# Altium PCB uPre V2.PcbDoc
Units mil, origin at the board's own origin, x right, y up, seen from the top; angles counter-clockwise.
Board outline 1245.03 x 955.03 mil, 2 copper layers (Top Layer, Bottom Layer); 21 components, 15 nets, 54 pads, 3 vias.
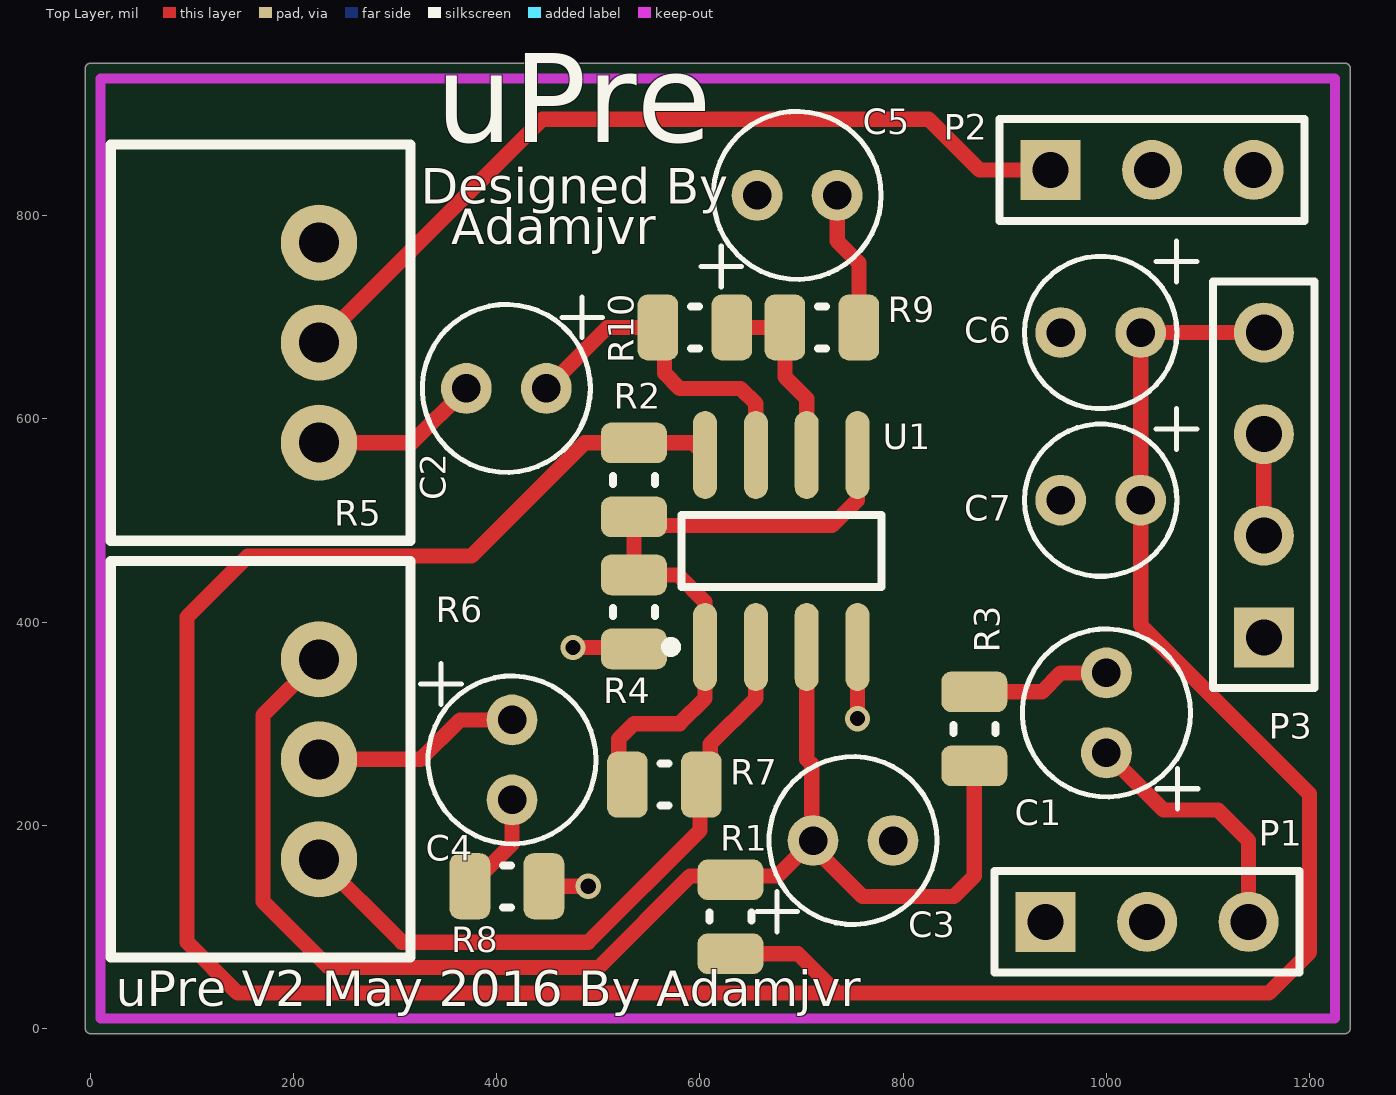
[diagram p0: Top Layer view]
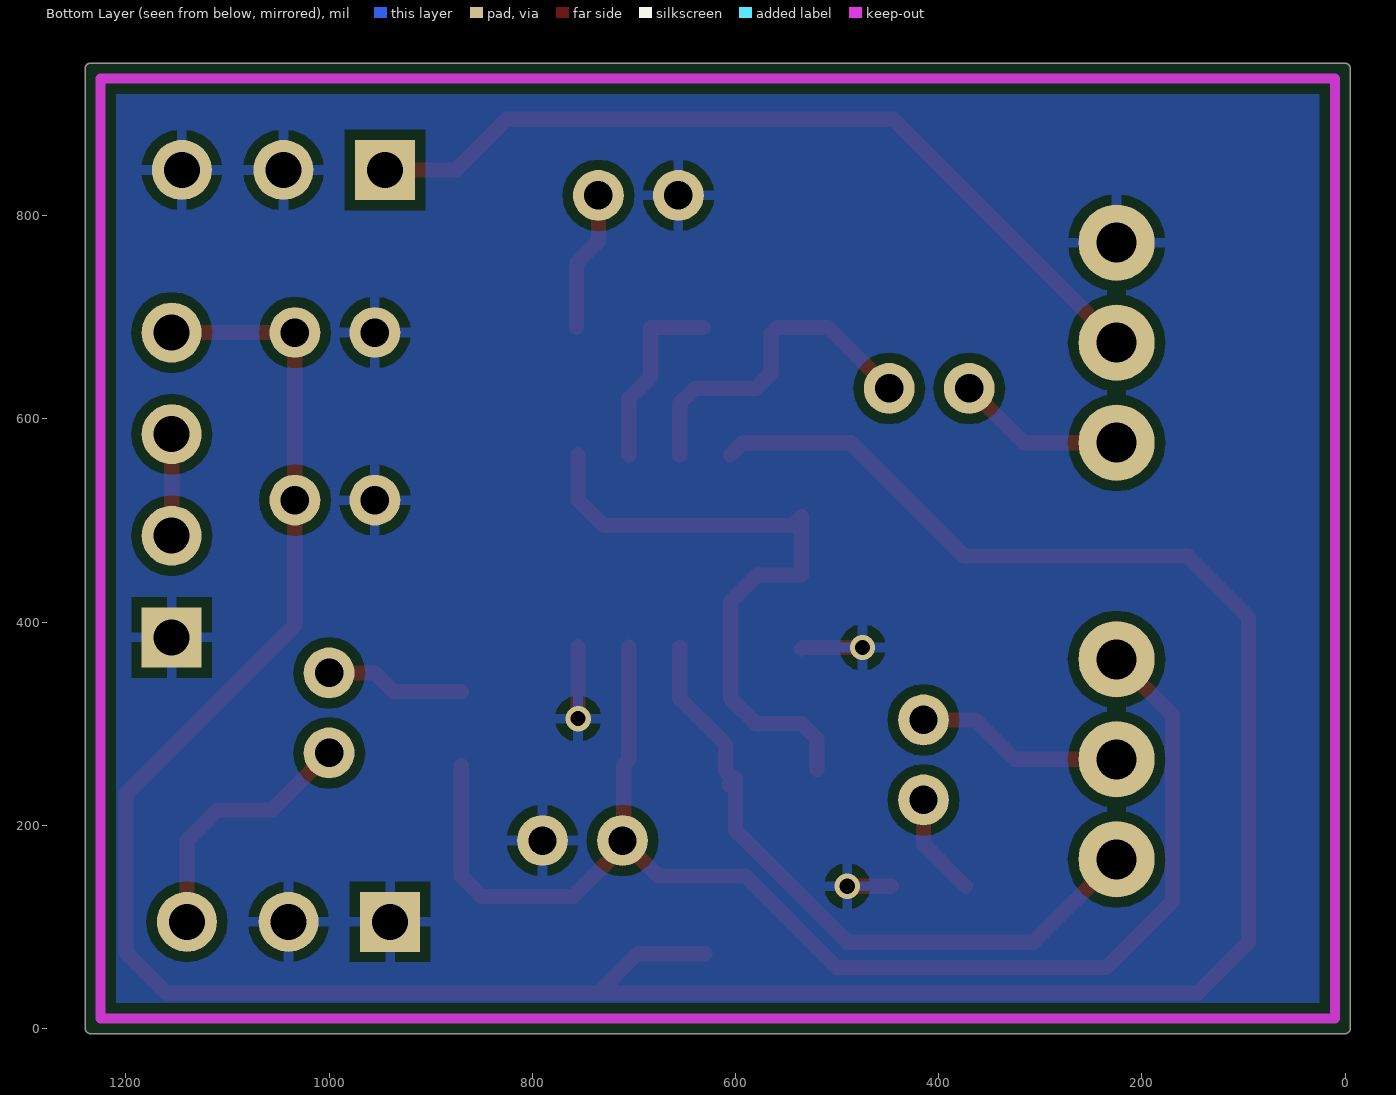
[diagram p1: Bottom Layer view, seen from below]

## Layer stack, top to bottom
Top Solder: solder mask 0.4, Solder Resist, Dk 3.5
Top Layer: signal copper 1.4
Dielectric 1: dielectric 12.6, FR-4, Dk 4.8
Bottom Layer: signal copper 1.4
Bottom Solder: solder mask 0.4, Solder Resist, Dk 3.5

## Board outline
0,-5.01 cw(c0,0) -5.01,0 -5.01,945 cw(c0,945) 0,950.01 1235,950.01 cw(c1235,945) 1240.01,945 1240.01,0 cw(c1235,0) 1235,-5.01

## Design rules (kind name [scope] priority, off if disabled: settings)
Clearance [All] p1: gap=10
HoleSize [All] p1: absolutevalues=TRUE maxlimit=100 minlimit=13 maxpercent=80.000 minpercent=20.000
PolygonConnect [All] p1: connectstyle=Relief reliefconductorwidth=10 reliefentries=4 polygonreliefangle="90 Angle" airgapwidth=10
RoutingVias [All] p1: holewidth=28 width=50 viastyle="Through Hole" minholewidth=28 minwidth=50 maxholewidth=28 maxwidth=50
SolderMaskExpansion [All] p1: expansion=4
Width [All] p1: maxlimit=50 minlimit=10 preferedwidth=15 minimp=50.000000 maximp=50.000000 favimp=50.000000
29 further rules are at their usual default settings.

## Components (designator, comment, footprint, x,y, rotation, side; value= is the part's Value field where it differs from the comment)
C1 "10uF" 4X6mmCAP 1000,350 r270 top
C2 "10uF" 4X6mmCAP 370,630 r0 top
C3 "0.22uF" 4X6mmCAP 790,185 r180 top
C4 "0.22uF" 4X6mmCAP 415,225 r90 top
C5 "10uF" 4X6mmCAP 735,820 r180 top
C6 "47uF" "5X12.5mmCAP - BLUE" 955,685 r0 top
C7 "47uF" "5X12.5mmCAP - BLUE" 955,520 r0 top
P1 "Header 3" HDR1X3 940,105 r0 top
P2 "Header 3" HDR1X3 945,845 r0 top
P3 "Header 4" HDR1X4 1155,385 r90 top
R1 "10K" R0805 630,110 r270 top
R2 "2.2M" R0805 535,540 r90 top
R3 "1K" R0805 870,295 r90 top
R4 "2.2M" R0805 535,410 r90 top
R5 "100K" BOURNS_PTD90SERIES_POT 225,675 r90 top
R6 "20K" BOURNS_PTD90SERIES_POT 225,265 r90 top
R7 "1K" R0805 565,240 r0 top
R8 "220r" R0805 410,140 r180 top
R9 "100K" R0805 720,690 r0 top
R10 "220K" R0805 595,690 r0 top
U1 "RC4580IDR" SOIC127P600X175-8N 680,470 r90 top

## Footprints (in the part's own frame and the unit in brackets; to place one, negate y for a bottom-side part, rotate by r counter-clockwise, add the part's x,y. Pads: shape width x height; smd on the part's side, far side on the other; paste and mask are expansions set on the pad)
4X6mmCAP [mil]
  round 50 hole 28: 1(78.74,0) 2(0,0)
  silkscreen extent -43,-83 134,90, body extent -39,-79 119,79, height 236
"5X12.5mmCAP - BLUE" [mil]
  round 50 hole 28: 1(78.74,0) 2(0,0)
  silkscreen extent -36,-75 134,90, body extent -35,-75 115,75, height 492
BOURNS_PTD90SERIES_POT [mm] "Bourns Inc PTD90 Series Potentiometers, throughhole right angle PCB MOunted"
  round 1.905 hole 1: 1(-2.5,0) 2(0,0) 3(2.5,0)
  silkscreen extent -4.95,-2.29 4.95,5.21, body extent -4.8,-2.13 4.8,20.02, height 11.2
HDR1X3 [mm] "Connector; Header; 3 Position"
  rect 1.5x1.5 hole 0.9: 1(0,0)
  round 1.5 hole 0.9: 2(2.54,0) 3(5.08,0)
  silkscreen extent -1.27,-1.27 6.35,1.27
HDR1X4 [mm] "Connector; Header; 4 Position"
  rect 1.5x1.5 hole 0.9: 1(0,0)
  round 1.5 hole 0.9: 2(2.54,0) 3(5.08,0) 4(7.62,0)
  silkscreen extent -1.27,-1.27 8.89,1.27
R0805 [mil]
  rrect50% 40x65 smd: 1(-36.42,0) 2(36.42,0)
  silkscreen extent -4,-21 4,21, body extent -43,-28 43,28, height 20
SOIC127P600X175-8N [mm] "SOIC, 8-Leads, Body 4.75x3.90mm, Pitch 1.27mm, IPC Medium Density"
  oval 2.2x0.6 smd: 1(-2.4,1.905) 2(-2.4,0.635) 3(-2.4,-0.635) 4(-2.4,-1.905) 5(2.4,-1.905) 6(2.4,-0.635) 7(2.4,0.635) 8(2.4,1.905)
  silkscreen extent -2.52,-2.5 0.9,2.88, body extent -2,-2.5 2,2.5, height 1.75

## Part data
C1 C2 C5: library part UMW1C100MDD1TP, "CAP ALUM 10UF 20% 16V RADIAL"
C3 C4: library part UMW1HR22MDD1TP, "CAP ALUM 0.22UF 20% 50V RADIAL"
C6 C7: library part UKA1E470MDD1TD, "CAP ALUM 47UF 20% 25V RADIAL"
P1 P2: "Header, 3-Pin"
P3: "Header, 4-Pin"
R1: library part ERJ-6ENF1002V, "RES SMD 10K OHM 1% 1/8W 0805"
R2 R4: library part RC2012F225CS, "RES SMD 2.2M OHM 1% 1/8W 0805"
R3 R7: library part RC2012F102CS, "RES SMD 1K OHM 1% 1/8W 0805"
R5: library part PTD901-2015K-B104, "POT 100K OHM 1/20W CARBON LINEAR"
R6: library part PTD901-2015K-B203, "POT 20K OHM 1/20W CARBON LINEAR"
R8: library part RC2012F221CS, "RES SMD 220 OHM 1% 1/8W 0805"
R9: library part ERJ-6ENF1003V, "RES SMD 100K OHM 1% 1/8W 0805"
R10: library part RC2012F224CS, "RES SMD 220K OHM 1% 1/8W 0805"
U1: "IC OPAMP AUDIO 12MHZ 8SOIC Low Noise, High Performance, High Fidelity Dual Audio Operational Amplifier, 8-pin Narrow SOIC"

## Via types
v1: diameter 25, hole 15, Top Layer to Bottom Layer, 3 vias

## Nets (pads, with @x,y where several pads share a name; then routed paths per layer and width w, separated by ;. In a path a pad name is that pad's centre, name@x,y a point inside that pad or via, vN(x,y) a via of type N, cw(c..) or ccw(c..) an arc to the next point about the centre after c; other vN are vias at no path point)
9VCC: C6.1 C7.1 P3.4 R1.2 R2.2 U1.8 | length 2964.3
  Top Layer w15: U1.8 593.07,576.42 R2.2 486.42,576.42 375,465 155,465 95,405 95,85 145,35 735,35 ; R1.2 696.42,73.58 735,35 ; C6.1@1033.74,675 C7.1 1033.74,397.2 1200,230.94 1200,75 1160,35 735,35 ; C6.1 P3.4@1160,685
GND: C3.2 C5.1 C6.2 C7.2 P1.1 P1.2 P2.2 P2.3 P3.1 R4.1 R5.3 R8.1 U1.4 | length 174.7
  Top Layer w15: R8.1 v1(490,140) ; v1(475,375) 533.58,375 R4.1 ; v1(755,305) U1.4
NetC1_1: C1.1 P1.3 | length 255.7
  Top Layer w15: C1.1 1056.26,215 1110,215 1140,185 P1.3
NetC1_2: C1.2 R3.2 | length 137.7
  Top Layer w15: R3.2 936.42,331.42 955,350 C1.2
NetC2_1: C2.1 R10.1 U1.7 | length 335.3
  Top Layer w15: C2.1 508.74,690 R10.1 565,683.58 565,645 580,630 640,630 655,615 U1.7
NetC2_2: C2.2 R5.1 | length 167.1
  Top Layer w15: R5.1 316.57,576.57 C2.2
NetC3_1: C3.1 R1.1 R3.1 R6.3 U1.3 | length 1376.3
  Top Layer w15: R6.3 170,308.43 170,125 235,60 500.36,60 590.36,150 676.26,150 C3.1 ; U1.3 705,265 710,260 710,186.26 C3.1 ; R3.1 870,150 850,130 760,130 711.26,178.74 C3.1
NetC4_1: C4.1 R6.2 | length 206
  Top Layer w15: R6.2 325,265 363.74,303.74 C4.1
NetC4_2: C4.2 R8.2 | length 102.2
  Top Layer w15: R8.2 415,181.42 C4.2
NetC5_2: C5.2 R9.2 | length 138.9
  Top Layer w15: C5.2 735,775 756.42,753.58 R9.2
NetP2_1: P2.1 R5.2 | length 831.8
  Top Layer w15: R5.2 445,895 825,895 875,845 P2.1
NetP3_2: P3.2 P3.3 | length 100
  Top Layer w15: P3.2 P3.3
NetR2_1: R2.1 R4.2 R7.1 U1.1 U1.5 | length 643.1
  Top Layer w15: R7.1@520,255 520,285 535,300 580,300 605,325 U1.1 605,420 578.58,446.42 R4.2 R2.1 543.58,495 730,495 755,520 U1.5
NetR6_1: R6.1 R7.2 U1.2 | length 672.6
  Top Layer w15: R6.1 306.57,85 490,85 600,195 600,246.42 R7.2@601.42,245 ; R7.2 R7.2@601.42,245 ; R7.2@606.42,240 R7.2@601.42,245 ; U1.2 655,325 610,280 610,253.58 R7.2@601.42,245
NetR9_1: R9.1 R10.2 U1.6 | length 186.5
  Top Layer w15: R10.2 R9.1 683.58,641.42 705,620 U1.6

## Polygon pours and split planes (outlines as drawn)
GND on Bottom Layer "Ground-Plane" (solid, remove dead copper, pour order 2): 0,945 1235,945 1235,0 0,0

## Keep-outs
Keep-Out Layer:
  lines w10: 10,10 10,935 1225,935 1225,10 10,10

## Silkscreen, mask and mechanical layers (free items; w line width, h text height)
Top Overlay:
  text "uPre" at 340,843.61 h150
  text "Designed By" at 325,800 h60
  text "Adamjvr" at 355,760 h60
  text "uPre V2 May 2016 By Adamjvr" at 25,10 h60
Mechanical 15:
  lines w10: 0,15 0,945 1235,945 1235,0 0,0 0,930